# Altium PCB SprinklerBoard.PcbDoc
Units mil, origin at the board's own origin, x right, y up, seen from the top; angles counter-clockwise.
Board outline 6000 x 6000 mil, 2 copper layers (Top Layer, Bottom Layer); 42 components, 48 nets, 148 pads, 12 vias.
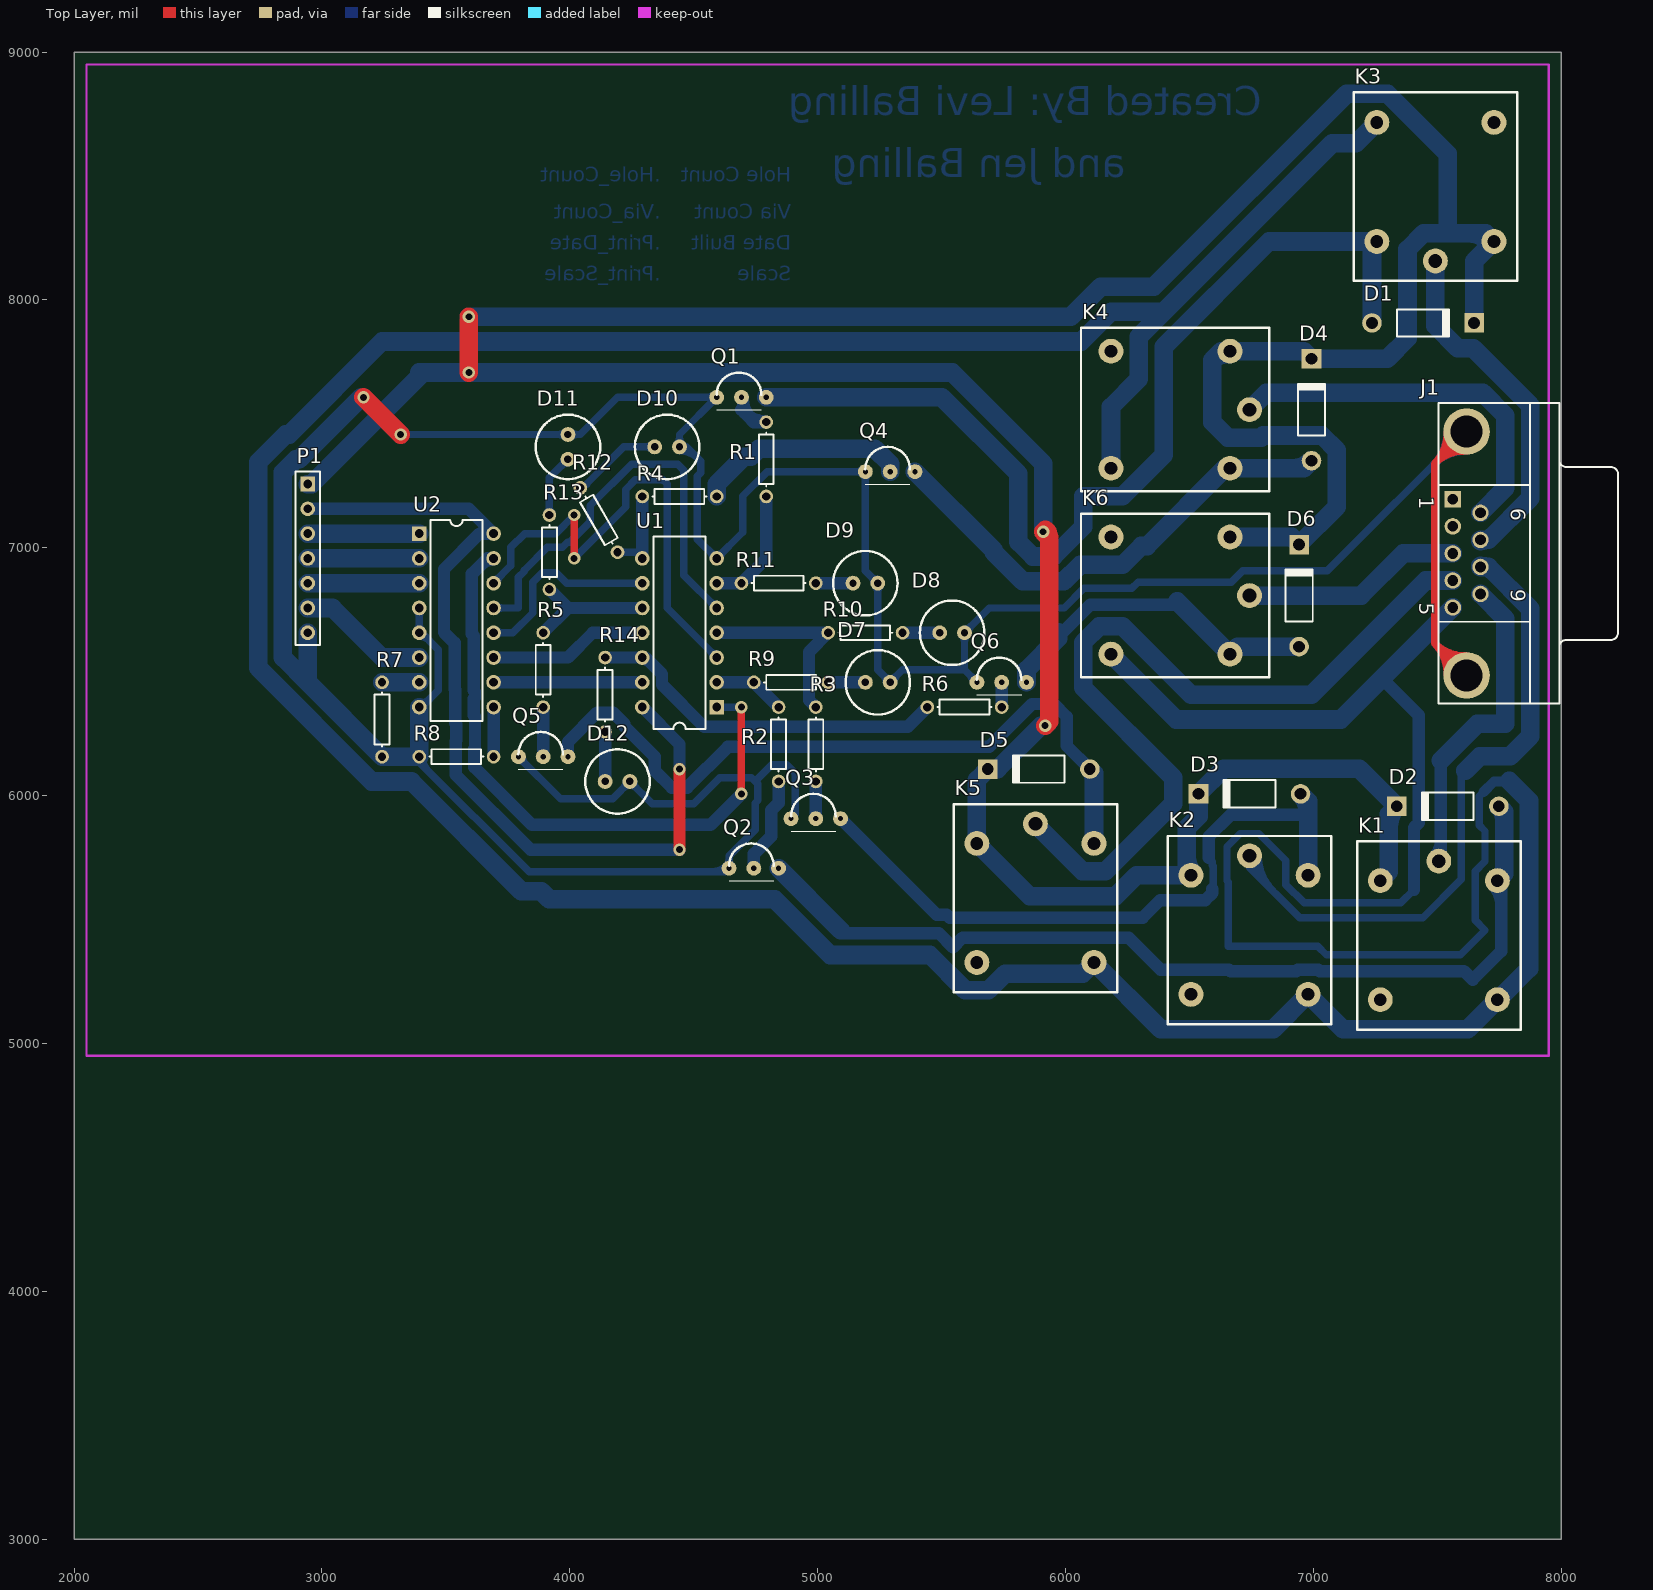
[diagram p0: Top Layer view]
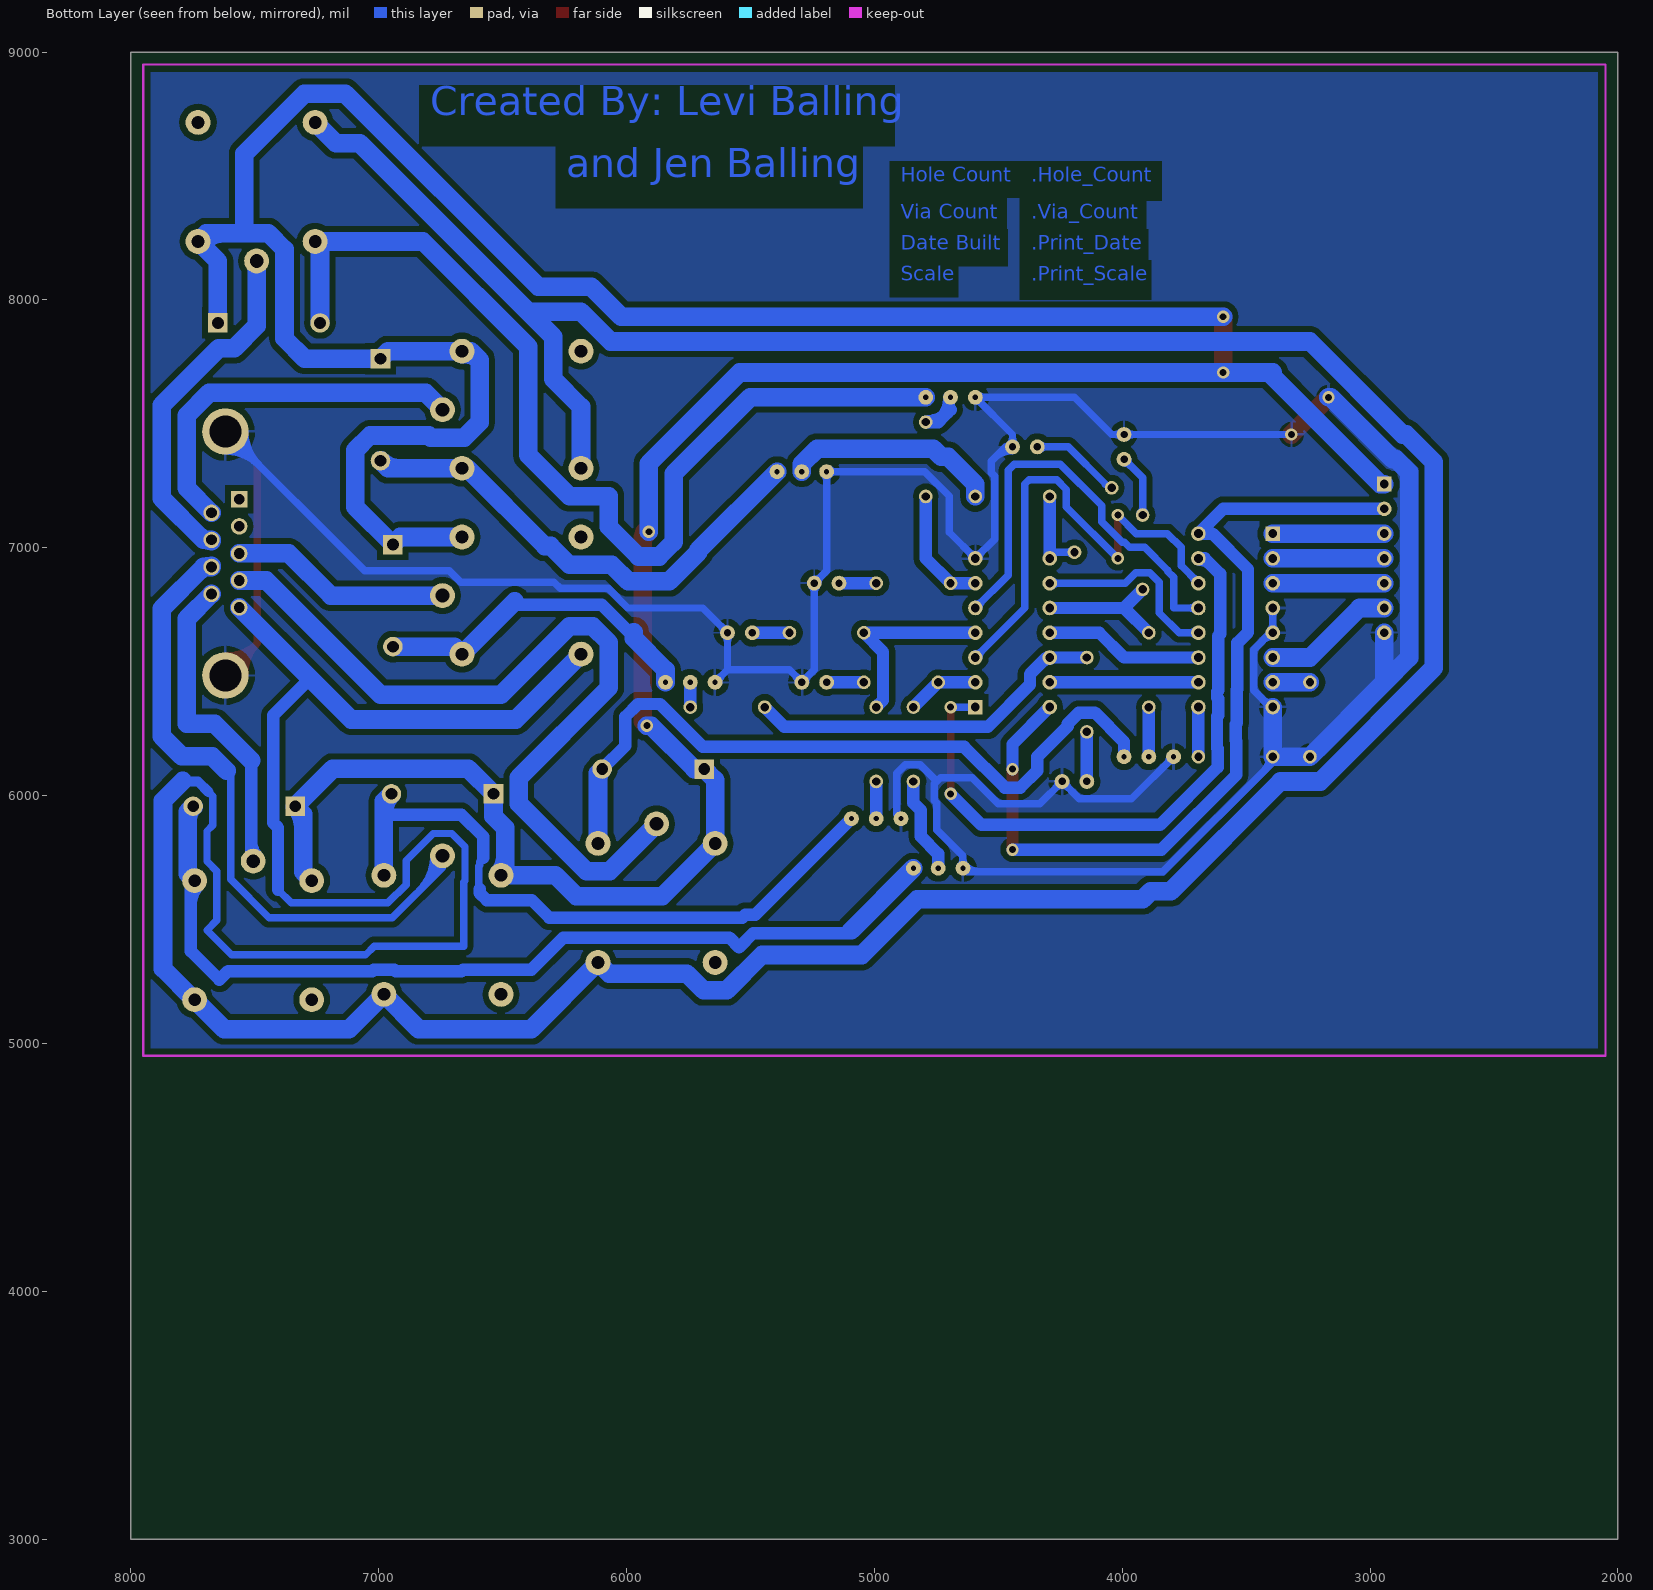
[diagram p1: Bottom Layer view, seen from below]

## Layer stack, top to bottom
Top Layer: signal copper 1.4
Dielectric: dielectric 12.6, FR-4, Dk 4.8
Bottom Layer: signal copper 1.4

## Board outline
2000,3000 8000,3000 8000,9000 2000,9000

## Design rules (kind name [scope] priority, off if disabled: settings)
Clearance [All] p1: gap=25
PolygonConnect [All] p1: connectstyle=Relief reliefconductorwidth=10 reliefentries=4 polygonreliefangle="90 Angle"
RoomDefinition SprinklerBoard [InComponentClass('SprinklerBoard')] p1: confinementstyle=ConfineIn formatcopy=TRUE lockcomponents=FALSE outline 7950,8950 2050,8950 2050,4950 7950,4950
RoutingVias [All] p1: holewidth=32 width=75 viastyle="Through Hole" minholewidth=28 minwidth=50 maxholewidth=28 maxwidth=50
SilkscreenOverComponentPads [All] p1: minsilkscreentomaskgap=10
SolderMaskExpansion [All] p1: expansion=4
Width [All] p1: maxlimit=100 minlimit=25 preferedwidth=50 minimp=50.000000 maximp=50.000000 favimp=50.000000
27 further rules are at their usual default settings.

## Components (designator, comment, footprint, x,y, rotation, side; value= is the part's Value field where it differs from the comment)
D1 "1N4001" DO-41 7442.5,7907.26 r0 top
D2 "1N4001" DO-41 7542.5,5957.26 r180 top
D3 "1N4001" DO-41 6742.5,6007.26 r180 top
D4 "1N4001" DO-41 6992.5,7557.26 r90 top
D5 "1N4001" DO-41 5892.5,6107.26 r180 top
D6 "1N4001" DO-41 6942.5,6807.26 r90 top
D7 "LED_White" LED 5192.5,6457.26 r0 top
D8 "LED_White" LED 5492.5,6657.26 r0 top
D9 "LED_White" LED 5142.5,6857.26 r0 top
D10 "LED_White" LED 4342.5,7407.26 r0 top
D11 "LED_White" LED 3992.5,7357.26 r90 top
D12 "LED_White" LED 4142.5,6057.26 r0 top
J1 "D Connector 9" DSUB1.385-2H9 7992.5,6977.26 r270 top
K1 "SPDT" "Relay  SPDT Tayda" 7506.28,5736 r0 top
K2 "SPDT" "Relay  SPDT Tayda" 6742.5,5757.26 r0 top
K3 "SPDT" "Relay  SPDT Tayda" 7492.5,8157.26 r180 top
K4 "SPDT" "Relay  SPDT Tayda" 6742.5,7557.26 r270 top
K5 "SPDT" "Relay  SPDT Tayda" 5878.72,5886 r0 top
K6 "SPDT" "Relay  SPDT Tayda" 6742.5,6807.26 r270 top
P1 "Header 7" HDR1X7 2942.5,7257.26 r270 top
Q1 "2N3904" 2N3904 4592.5,7607.26 r0 top
Q2 "2N3904" 2N3904 4642.5,5707.26 r0 top
Q3 "2N3904" 2N3904 4892.5,5907.26 r0 top
Q4 "2N3904" 2N3904 5192.5,7307.26 r0 top
Q5 "2N3904" 2N3904 3792.5,6157.26 r0 top
Q6 "2N3904" 2N3904 5642.5,6457.26 r0 top
R1 "Res1" AXIAL-0.3 4792.5,7357.26 r270 top
R2 "Res1" AXIAL-0.3 4842.5,6207.26 r90 top
R3 "Res1" AXIAL-0.3 4992.5,6207.26 r90 top
R4 "Res1" AXIAL-0.3 4442.5,7207.26 r180 top
R5 "Res1" AXIAL-0.3 3892.5,6507.26 r90 top
R6 "Res1" AXIAL-0.3 5592.5,6357.26 r180 top
R7 "Res1" AXIAL-0.3 3242.5,6307.26 r90 top
R8 "Res1" AXIAL-0.3 3542.5,6157.26 r0 top
R9 "Res1" AXIAL-0.3 4892.5,6457.26 r0 top
R10 "Res1" AXIAL-0.3 5192.5,6657.26 r0 top
R11 "Res1" AXIAL-0.3 4842.5,6857.26 r0 top
R12 "Res1" AXIAL-0.3 4117.5,7112.17 r120 top
R13 "Res1" AXIAL-0.3 3917.5,6982.26 r90 top
R14 "Res1" AXIAL-0.3 4142.5,6407.26 r270 top
U1 "SN7416N" N014 4442.5,6657.26 r90 top
U2 "74AC138B" DIP16 3542.5,6707.26 r270 top

## Footprints (in the part's own frame and the unit in brackets; to place one, negate y for a bottom-side part, rotate by r counter-clockwise, add the part's x,y. Pads: shape width x height; smd on the part's side, far side on the other; paste and mask are expansions set on the pad)
2N3904 [mil] "simple transistor, but bigger holes and pads"
  round 60 hole 21: 1(0,0) 2(100,0) 3(200,0)
  silkscreen extent 0,-50 180,100
AXIAL-0.3 [mm] "Axial Device, Thru-Hole; 2 Leads; 0.3 in Pin Spacing"
  round 1.4 hole 0.85: 1(-3.81,0) 2(3.81,0)
  silkscreen extent -2.77,-0.76 2.77,0.76
DIP16 [mm] "DIP; 16 Leads; Row Spacing 7.62 mm; Pitch 2.54 mm"
  rect 1.5x1.5 hole 0.9: 1(-8.89,-3.81)
  round 1.5 hole 0.9: 2(-6.35,-3.81) 3(-3.81,-3.81) 4(-1.27,-3.81) 5(1.27,-3.81) 6(3.81,-3.81) 7(6.35,-3.81) 8(8.89,-3.81) 9(8.89,3.81) 10(6.35,3.81) 11(3.81,3.81) 12(1.27,3.81) 13(-1.27,3.81) 14(-3.81,3.81) 15(-6.35,3.81) 16(-8.89,3.81)
  silkscreen extent -10.3,-2.65 10.3,2.65
DO-41 [mm] "Diode, Axial; Body 5.2 x 2.7 mm (LxDia. max), Lead Dia. 0.86 mm (max)"
  round 2 hole 1.2: 1(-5.23,0)
  rect 2x2 hole 1.2: 2(5.23,0)
  silkscreen extent -2.65,-1.4 2.75,1.4
DSUB1.385-2H9 [mm] "Connector; D Subminiature; 9 Position; Right Angle; Pitch 1.385 mm"
  rect 1.69x1.69 hole 1.09: 1(-5.54,-10.92)
  round 1.69 hole 1.09: 2(-2.77,-10.92) 3(0,-10.92) 4(2.77,-10.92) 5(5.54,-10.92) 6(-4.155,-8.08) 7(-1.385,-8.08) 8(1.385,-8.08) 9(4.155,-8.08)
  round 4.76 hole 3.26: 10(-12.495,-9.5) 11(12.495,-9.5)
  silkscreen extent -15.4,-12.4 15.4,6
HDR1X7 [mm] "Connector; Header; 7 Position"
  rect 1.5x1.5 hole 0.9: 1(0,0)
  round 1.5 hole 0.9: 2(2.54,0) 3(5.08,0) 4(7.62,0) 5(10.16,0) 6(12.7,0) 7(15.24,0)
  silkscreen extent -1.27,-1.27 16.51,1.27
LED [mil] "standard 5mm LED"
  round 60 hole 30: 1(0,0) 2(100,0)
  silkscreen extent -80,-130 180,130
N014 [mm] "DIP; 14 Leads; Row Spacing 7.62 mm; Pitch 2.54 mm"
  rect 1.5x1.5 hole 0.9: 1(-7.62,-3.81)
  round 1.5 hole 0.9: 2(-5.08,-3.81) 3(-2.54,-3.81) 4(0,-3.81) 5(2.54,-3.81) 6(5.08,-3.81) 7(7.62,-3.81) 8(7.62,3.81) 9(5.08,3.81) 10(2.54,3.81) 11(0,3.81) 12(-2.54,3.81) 13(-5.08,3.81) 14(-7.62,3.81)
  silkscreen extent -9.85,-2.65 9.85,2.65
"Relay  SPDT Tayda" [mm] "this is the ATTC-3372"
  round 2.54 hole 1.4: 0(0,0)
  round 2.54 hole 1.3: 1(6,-2) 2(-6,-2) 3(6,-14.2) 4(-6,-14.2)
  silkscreen extent -8.38,-17.27 8.38,2.03

## Part data
D1 D2 D3 D4 D5 D6: "1.0 Ampere General Purpose Rectifier"
D7 D8 D9 D10 D11 D12: library part LED0, "Typical INFRARED GaAs LED"
J1: "Receptacle Assembly, 9 Position, Right Angle"
P1: "Header, 7-Pin"
Q1 Q2 Q3 Q4 Q5 Q6: "NPN General Purpose Amplifier"
R1 R2 R3 R4 R5 R6 R7 R8 R9 R10 R11 R12 R13 R14: "Resistor"
U1: "Hex Inverter Buffer / Driver with High-Voltage Outputs"
U2: "3-to-8 Line Decoder Inverting"

## Via types
v1: diameter 50, hole 28, Top Layer to Bottom Layer, 12 vias

## Nets (pads, with @x,y where several pads share a name; then routed paths per layer and width w, separated by ;. In a path a pad name is that pad's centre, name@x,y a point inside that pad or via, vN(x,y) a via of type N, cw(c..) or ccw(c..) an arc to the next point about the centre after c; other vN are vias at no path point)
DEMUX_A: P1.3 U2.1 | length 450
  Bottom Layer w75: P1.3 U2.1
DEMUX_B: P1.4 U2.2 | length 450
  Bottom Layer w75: P1.4 U2.2
DEMUX_C: P1.5 U2.3 | length 450
  Bottom Layer w75: P1.5 U2.3
GND: D7.2 D8.2 D9.2 D10.2 D11.2 D12.2 J1.10 J1.11 P1.7 Q1.1 Q2.1 Q3.1 Q4.1 Q5.1 Q6.1 R7.1 R8.1 U1.7 U2.4 U2.5 U2.8 | length 17199.3
  Top Layer w30: J1.11@7539.81,6487.55 ccw(c7367.24,6492.42) 7489.32,6614.5 ; J1.10@7539.81,7466.97 cw(c7367.24,7462.1) 7489.32,7340.03 cw(c7611.4,7217.95) J1.10@7616.26,7390.52 ; J1.11@7569.8,6486.71 ccw(c7463.01,6489.72) 7538.55,6565.27 ccw(c7614.1,6640.81) J1.11@7617.11,6534.02 ; J1.10@7569.8,7467.82 cw(c7463.01,7464.81) 7538.55,7389.26 cw(c7614.1,7313.72) J1.10@7617.11,7420.51 ; J1.11@7616.26,6564 cw(c7611.4,6736.58) 7489.32,6614.5 ; J1.11 7489.31,6614.51 ; J1.10 7489.31,7340.02 7489.31,6614.51
  Top Layer w75: v1(3167.5,7607.26) v1(3317.5,7457.26)
  Bottom Layer w30: v1(3317.5,7457.26) D11.2 4042.5,7457.26 4192.5,7607.26 Q1.1 4442.5,7457.26 D10.2 4470.28,7407.26 4528.81,7348.74 4528.81,7303.17 4515,7289.37 4515,7034.76 U1.7 4696.96,7061.72 4696.96,7207.26 4796.96,7307.26 Q4.1 5192.5,6907.26 D9.2 5242.5,6507.26 D7.2 5342.5,6507.26 5592.5,6507.26 ; U2.5@3382.23,6667.54 ccw(c3357.43,6692.34) 3392.5,6692.34 ccw(c3427.57,6692.34) U2.5@3402.77,6667.54 ; U2.4@3382.23,6746.99 cw(c3357.43,6722.19) 3392.5,6722.19 cw(c3427.57,6722.19) U2.4@3402.77,6746.99 ; R8.1 3392.5,6135.53 3835.77,5692.26 4627.5,5692.26 Q2.1 4642.5,5757.26 4747.5,5862.26 4747.5,5970.34 4757.5,5980.34 4757.5,6047.81 4747.5,6057.81 ; U2.8 3402.1,6357.26 3470,6425.16 3470,6589.37 3402.1,6657.26 U2.5 U2.4 ; U2.8@3392.5,6371.79 ccw(c3392.5,6430.04) 3433.69,6388.85 ; U2.5@3392.5,6642.74 cw(c3392.5,6584.48) 3433.69,6625.67 ; R8.1@3405.06,6157.26 ccw(c3487.85,6157.26) 3429.31,6098.72 ; Q5.1@3792.5,6142.26 cw(c3792.5,6106.05) 3818.11,6131.66 cw(c3843.71,6157.26) Q5.1@3807.5,6157.26 ; Q5.1 3962.5,5987.26 4172.5,5987.26 D12.2 4332.5,5967.26 4500.49,5967.26 4605.49,6072.26 4733.04,6072.26 4747.5,6057.81 ; D11.2@3981.89,7446.66 ccw(c3956.29,7421.05) 3956.29,7457.26 ccw(c3956.29,7493.48) D11.2@3981.89,7467.87 ; D11.2@4003.11,7446.66 cw(c4028.71,7421.05) 4028.71,7457.26 cw(c4028.71,7493.48) D11.2@4003.11,7467.87 ; D12.2@4227.5,6057.26 cw(c4191.29,6057.26) 4216.89,6031.66 cw(c4242.5,6006.05) 4242.5,6042.26 cw(c4242.5,6006.05) 4268.11,6031.66 cw(c4293.71,6057.26) D12.2@4257.5,6057.26 ; D10.2@4431.89,7417.87 ccw(c4406.29,7443.48) 4442.5,7443.48 ccw(c4478.71,7443.48) D10.2@4453.11,7417.87 ; D10.2@4442.5,7392.26 cw(c4442.5,7288.98) 4515.53,7362.01 ; 4570.07,5692.26 ccw(c4570.07,5779.69) 4631.89,5717.87 ccw(c4606.29,5743.48) 4642.5,5743.48 ccw(c4678.71,5743.48) Q2.1@4653.11,5717.87 ; Q1.1@4577.5,7607.26 cw(c4541.29,7607.26) 4566.89,7581.66 cw(c4592.5,7556.05) Q1.1@4592.5,7592.26 ; U1.7@4577.97,6957.26 ccw(c4542.9,6957.26) 4567.7,6982.06 ccw(c4592.5,7006.86) 4592.5,6971.79 ccw(c4592.5,7006.86) 4617.3,6982.06 ccw(c4642.1,6957.26) U1.7@4607.03,6957.26 ; Q1.1@4581.89,7596.66 ccw(c4556.29,7571.05) 4556.29,7607.26 ccw(c4556.29,7643.48) Q1.1@4581.89,7617.87 ; Q3.1 4910.06,5924.82 4910.06,6089.7 4874.94,6124.82 4814.52,6124.82 4747.5,6057.81 ; Q4.1@5181.89,7317.87 cw(c5156.29,7343.48) 5156.29,7307.26 cw(c5156.29,7271.05) 5181.89,7296.66 cw(c5156.29,7271.05) 5192.5,7271.05 cw(c5228.71,7271.05) Q4.1@5203.11,7296.66 ; D9.2@5227.5,6857.26 ccw(c5191.29,6857.26) 5216.89,6882.87 ccw(c5242.5,6908.48) D9.2@5242.5,6872.26 ; D9.2@5231.89,6846.66 cw(c5206.29,6821.05) 5242.5,6821.05 cw(c5278.71,6821.05) D9.2@5253.11,6846.66 ; D7.2@5277.5,6457.26 ccw(c5241.29,6457.26) 5266.89,6482.87 ccw(c5292.5,6508.48) 5292.5,6472.26 ccw(c5292.5,6508.48) 5318.11,6482.87 ccw(c5343.71,6457.26) D7.2@5307.5,6457.26 ; D8.2@5581.89,6646.66 cw(c5556.29,6621.05) 5592.5,6621.05 cw(c5628.71,6621.05) D8.2@5603.11,6646.66 ; D8.2@5592.5,6672.26 ccw(c5592.5,6708.48) 5618.11,6682.87 ccw(c5643.71,6657.26) D8.2@5607.5,6657.26 ; Q6.1@5627.5,6457.26 ccw(c5591.29,6457.26) 5616.89,6482.87 ccw(c5642.5,6508.48) Q6.1@5642.5,6472.26 ; Q6.1 5592.5,6507.26 ; J1.10@7539.78,7469.19 cw(c7349.78,7469.19) 7484.13,7334.84 cw(c7618.48,7200.49) J1.10@7618.48,7390.49 ; J1.10@7569.78,7469.19 cw(c7452.21,7469.19) 7535.35,7386.06 cw(c7618.48,7302.92) J1.10@7618.48,7420.49 ; J1.10 7056.56,6907.26 6715.22,6907.26 6669,6861.04 6292.5,6861.04 6267.5,6836.04 6073.68,6836.04 5994.9,6757.26 5692.5,6757.26 D8.2 5592.5,6507.26
  Bottom Layer w75: P1.7 2942.5,6457.26 ; v1(3167.5,7607.26) 3158.92,7607.26 2908.92,7357.26 2895.06,7357.26 2842.5,7304.71 2842.5,6557.26 2942.5,6457.26 ; U2.8 R8.1 R7.1 2942.5,6457.26
NetD1_1: D1.1 K3.1 Q1.3 | length 4082.8
  Bottom Layer w75: Q1.3 5501.08,7607.26 5809.98,7298.37 5809.98,7023.37 5868.56,6964.79 5951.4,6964.79 6070.94,7084.33 6070.94,7208.54 6230.04,7208.54 6395.94,7374.44 6395.94,7810.71 6821.24,8236 K3.1 7236.59,8216.32 D1.1
NetD2_1: D2.1 K1.1 Q2.3 | length 3946.8
  Bottom Layer w50: 5092.5,5457.26 5105,5444.76 5489.33,5444.76 5546,5388.09 5584.85,5426.95 6254.7,5426.95 6383.44,5298.21 6659.63,5298.21 6665.58,5292.26 6931.35,5292.26 6937.3,5298.21 7020.14,5298.21 7026.09,5292.26 7607.5,5292.26 7642.5,5257.26 7757.5,5372.26 7757.5,5642.26 K1.1 ; K1.1@7724.82,5639.59 cw(c7645.93,5560.7) 7757.5,5560.7
  Bottom Layer w75: Q2.3 5092.5,5457.26 ; K1.1 7770,5684.76 7770,5935.67 D2.1 ; D2.1@7747.08,5955.94 cw(c7691.76,5900.62) 7770,5900.62
NetD3_1: D3.1 K2.1 Q3.3 | length 2813.4
  Bottom Layer w30: 6577.5,5748.72 6592.5,5733.72 6592.5,5719.58 6596.28,5715.8 6596.28,5641.24 6592.5,5637.47 6592.5,5623.32
  Bottom Layer w50: Q3.3 5480,5519.76 5520.4,5519.76 5532.9,5507.26 6311.12,5507.26 6382.38,5578.52 6563.76,5578.52 6592.5,5607.26 6592.5,5623.32 ; 6577.5,5748.72 6577.5,5834.19 6665.58,5922.26 6963.72,5922.26 6978.72,5907.26
  Bottom Layer w75: D3.1@6947.08,6005.94 cw(c6870.7,5929.56) 6978.72,5929.56 ; D3.1 6978.72,5976.95 6978.72,5907.26 K2.1
NetD4_1: D4.1 K4.1 Q4.3 | length 2074.3
  Bottom Layer w75: Q4.3 5709.98,6989.79 5709.98,6981.94 5827.13,6864.79 5992.82,6864.79 6059.02,6930.98 6230.04,6930.98 6306.32,7007.26 6329.12,7007.26 6642.9,7321.04 K4.1 6962.19,7321.04 D4.1 ; 6914.8,7321.04 ccw(c6914.8,7429.06) D4.1@6991.18,7352.68
NetD5_1: D5.1 K5.1 Q5.3 | length 3050.5
  Bottom Layer w50: Q5.3 3992.5,6216.95 4110.37,6334.82 4174.63,6334.82 4220.06,6289.39 4220.06,6279.7 4342.5,6157.26 4342.5,6101.2 4411.43,6032.26 4473.57,6032.26 4637.94,6196.63 5691.56,6196.63 5864.69,6369.76 5953.74,6369.76 6005,6318.51 6005,6200.67 D5.1
  Bottom Layer w75: D5.1@6097.08,6105.94 cw(c6053.97,6062.83) 6114.94,6062.83 ; D5.1 6114.94,6090.73 K5.1
NetD6_1: D6.1 K6.1 Q6.3 | length 1378.7
  Bottom Layer w50: 5970.94,6659.06 5988.62,6659.06 6100.6,6771.04 6438.76,6771.04 6451.26,6783.54
  Bottom Layer w75: Q6.3 5842.5,6507.26 5970.94,6635.71 5970.94,6659.06 ; 6451.26,6783.54 K6.1 6694.07,6601.36 D6.1
NetD7_1: D7.1 R9.2 | length 150
  Bottom Layer w50: R9.2 D7.1
NetD8_1: D8.1 R10.2 | length 150
  Bottom Layer w50: R10.2 D8.1
NetD9_1: D9.1 R11.2 | length 150
  Bottom Layer w50: R11.2 D9.1
NetD10_1: D10.1 R12.2 | length 394
  Bottom Layer w30: 4067.5,7257.26 4217.5,7407.26 D10.1 ; D10.1@4331.89,7396.66 ccw(c4306.29,7371.05) 4306.29,7407.26 ccw(c4306.29,7443.48) D10.1@4331.89,7417.87
NetD11_1: D11.1 R13.2 | length 360.6
  Bottom Layer w30: R13.2@3908.62,7141.14 ccw(c3887.18,7162.58) 3917.5,7162.58 ccw(c3947.82,7162.58) R13.2@3926.38,7141.14 ; R13.2 3917.5,7282.26 D11.1 ; D11.1@3977.5,7357.26 cw(c3941.29,7357.26) 3966.89,7331.66 cw(c3992.5,7306.05) D11.1@3992.5,7342.26
NetD12_1: D12.1 R14.2 | length 200
  Bottom Layer w50: D12.1 R14.2
NetQ1_2: Q1.2 R1.1 | length 324.7
  Bottom Layer w50: 4692.5,7557.26 4742.5,7507.26 R1.1 ; Q1.2@4697.5,7607.26 ccw(c4830.28,7607.26) 4736.39,7513.37 ; 4702.78,7546.99 ccw(c4792.5,7636.71) R1.1@4792.5,7509.82
NetQ2_2: Q2.2 R2.1 | length 391.4
  Bottom Layer w50: Q2.2 4742.5,5765.34 4812.5,5835.34 4812.5,5940.4 4842.5,5970.4 R2.1
NetQ3_2: Q3.2 R3.1 | length 150
  Bottom Layer w50: Q3.2 R3.1
NetQ4_2: Q4.2 R4.1 | length 865.4
  Bottom Layer w75: R4.1 4592.5,7257.26 4702.44,7367.2 4729.8,7367.2 4762.36,7399.76 5230.81,7399.76 5292.5,7338.08 Q4.2
NetQ5_2: Q5.2 R5.1 | length 200
  Bottom Layer w50: Q5.2 R5.1
NetQ6_2: Q6.2 R6.1 | length 100
  Bottom Layer w50: R6.1 Q6.2
NetR7_2: R7.2 U2.7 | length 150
  Bottom Layer w75: R7.2 U2.7
NetR8_2: R8.2 U2.9 | length 200
  Bottom Layer w50: R8.2 U2.9
NetU1_1: U1.1 U2.15 | length 2690.2
  Top Layer w30: v1(4692.5,6007.26) v1(4692.5,6357.26)
  Bottom Layer w30: U1.1 v1(4692.5,6357.26) ; U1.1@4602.77,6346.99 cw(c4627.57,6322.19) 4627.57,6357.26 cw(c4627.57,6392.34) U1.1@4602.77,6367.54
  Bottom Layer w50: 3642.09,6931.86 cw(c3692.5,6881.45) U2.15@3692.5,6952.74 ; U2.15 3667.5,6957.26 3605,6894.76 3605,6652.36 3612.97,6644.38 3612.97,6424.32 3617.5,6419.8 3617.5,6394.73 3612.97,6390.21 3612.97,6324.32 3617.5,6319.8 3617.5,6191.95 3614.94,6189.39 3614.94,6114.63 3847.31,5882.26 4567.5,5882.26 v1(4692.5,6007.26)
NetU1_3: U1.3 U2.14 | length 2106
  Top Layer w30: v1(4017.5,6957.26) v1(4017.5,7132.26)
  Bottom Layer w30: U2.14 3692.5,6858.94 3762.03,6928.46 3762.03,7001.79 3817.5,7057.26 3942.5,7057.26 v1(4017.5,7132.26) ; U2.14@3692.5,6871.79 ccw(c3692.5,6902.82) 3714.44,6880.88 ; U2.14@3707.03,6857.26 cw(c3746.14,6857.26) 3718.48,6884.92 ; v1(4017.5,6957.26) 4224.94,7164.7 4224.94,7235.25 4264.52,7274.82 4374.94,7274.82 4392.5,7257.26 4392.5,6757.26 U1.3 ; U1.3@4577.97,6557.26 ccw(c4542.9,6557.26) 4567.7,6582.06 ccw(c4592.5,6606.86) U1.3@4592.5,6571.79
NetU1_5: U1.5 U2.13 | length 1851.2
  Bottom Layer w30: U2.13 3792.5,6757.26 3792.5,6881.16 3817.03,6905.68 3817.03,6909.57 3909.72,7002.26 3970.58,7002.26 3990.58,7022.26 3999.42,7022.26 4082.5,7105.34 4082.5,7170.59 4249.18,7337.26 4434.88,7337.26 4460,7312.15 4460,6889.76 U1.5 ; U2.13@3702.77,6746.99 cw(c3727.57,6722.19) 3727.57,6757.26 cw(c3727.57,6792.34) U2.13@3702.77,6767.54 ; U1.5@4577.97,6757.26 ccw(c4542.9,6757.26) 4567.7,6782.06 ccw(c4592.5,6806.86) U1.5@4592.5,6771.79
NetU1_9: U1.9 U2.12 | length 900.5
  Bottom Layer w30: U2.12 3770.28,6657.26 3849.94,6736.92 3849.94,6860.25 3889.52,6899.82 3945.48,6899.82 3988.04,6857.26 U1.9 ; U2.12@3702.77,6646.99 cw(c3727.57,6622.19) 3727.57,6657.26 cw(c3727.57,6692.34) U2.12@3702.77,6667.54 ; U1.9@4282.23,6846.99 ccw(c4257.43,6822.19) 4257.43,6857.26 ccw(c4257.43,6892.34) U1.9@4282.23,6867.54
NetU1_11: U1.11 U2.11 | length 641.4
  Bottom Layer w50: U2.11 3992.5,6557.26 4092.5,6657.26 U1.11
NetU1_13: U1.13 U2.10 | length 600
  Bottom Layer w50: U2.10 U1.13
SPRINKLER_24_AC_VCC: J1.5 K1.3 K2.3 K3.3 K4.3 K5.3 K6.3 | length 19259.2
  Bottom Layer w30: 7406.28,5621.04 7352.5,5567.26 6962.7,5567.26 6888.72,5641.24 6888.72,5738.32 6779.78,5847.26 6705.22,5847.26 6651.69,5793.74 6651.69,5656.05 6657.5,5650.25 6657.5,5392.26 7018.01,5392.26 7053.01,5357.26 7592.5,5357.26 7692.5,5457.26 7652.5,5497.26 7652.5,5694.54 7692.5,5734.54 7692.5,5857.26 7669.04,5880.73 7669.04,5997.21 7685.79,6013.97 ; 7788.76,6057.26 7790.63,6059.13
  Bottom Layer w40: 7685.79,6013.97 7729.09,6057.26 7788.76,6057.26
  Bottom Layer w50: 7276.59,6473.17 7425.96,6323.8 7425.96,5890.73 7406.28,5871.04 7406.28,5621.04
  Bottom Layer w75: K6.3 6447.22,6307.26 7110.69,6307.26 7276.59,6473.17 J1.5 ; K4.3 6183.44,7568.48 6295.94,7680.98 6295.94,7852.13 6396.79,7952.97 ; K3.3 7172.22,8632.26 7076.08,8632.26 6396.79,7952.97 ; 7790.63,6059.13 7870,5979.76 7870,5302.26 7744.69,5176.95 K1.3 7622.81,5057.26 7119.67,5057.26 K2.3 6837.78,5057.26 6384.63,5057.26 K5.3 6070.26,5282.26 5756.91,5282.26 5689.1,5214.45 5595.9,5214.45 5453.09,5357.26 5051.08,5357.26 4826.08,5582.26 3917.5,5582.26 3885,5614.76 3803.67,5614.76 3361.17,6057.26 3201.08,6057.26 2742.5,6515.84 2742.5,7346.13 2853.64,7457.26 2867.5,7457.26 3242.5,7832.26 6063.13,7832.26 6183.84,7952.97 6396.79,7952.97
SPRINKLER_DEMUX_ENABLED: P1.6 U2.6 | length 532.8
  Bottom Layer w75: P1.6 3042.5,6757.26 3242.5,6557.26 U2.6
SPRINKLERGND: J1.1
SPRINKLERSTATION1: J1.9 K1.0 | length 1363.7
  Bottom Layer w50: K1.0@7488.6,5753.68 ccw(c7428.58,5813.71) 7513.46,5813.71 ; K1.0@7513.46,5743.19 7513.46,6141.98
  Bottom Layer w75: K1.0 K1.0@7513.46,5743.19 ; 7513.46,6141.98 7660.94,6289.45 7774.69,6289.45 7774.69,6713.39 J1.9
SPRINKLERSTATION2: J1.8 K2.0 | length 2909.4
  Bottom Layer w30: K2.0 6742.5,5709.68 6944.92,5507.26 7442.5,5507.26 7597.5,5662.26 7597.5,6084.59 7613.46,6100.56 ; K2.0@6747.5,5757.26 ccw(c6874.44,5757.26) 6784.68,5667.5 ; K2.0@6777.5,5757.26 ccw(c6976.87,5757.26) 6835.89,5616.29
  Bottom Layer w75: 7613.46,6100.56 7672.04,6159.13 7794.37,6159.13 7875,6239.76 7875,6754.49 7706.76,6922.74 J1.8 ; J1.8@7674.39,6926.97 cw(c7674.39,6859.05) 7722.42,6907.08
SPRINKLERSTATION3: J1.7 K3.0 | length 1475.3
  Bottom Layer w75: K3.0 7492.5,7896.04 7583.15,7805.39 7644.61,7805.39 7875,7575 7875,7200.04 7706.76,7031.79 J1.7 ; J1.7@7674.39,7027.56 ccw(c7674.39,7095.48) 7722.42,7047.45
SPRINKLERSTATION4: J1.6 K4.0 | length 1532.9
  Bottom Layer w75: K4.0 6810.63,7625.39 7683.18,7625.39 7774.69,7533.89 7774.69,7241.14 J1.6
SPRINKLERSTATION5: J1.4 K5.0 | length 3374
  Bottom Layer w75: K5.0 5878.72,5884.39 6068.34,5694.76 6161.54,5694.76 6434.72,5967.95 6434.72,6072.52 6070.94,6436.3 6070.94,6617.64 6136.85,6683.54 6230.04,6683.54 6506.32,6407.26 6992.5,6407.26 7453.44,6868.21 J1.4
SPRINKLERSTATION6: J1.3 K6.0 | length 890.5
  Bottom Layer w75: K6.0 7192.5,6807.26 7362.5,6977.26 J1.3
STATION1TRIGGER: R2.2 R9.1 U1.2 | length 291.4
  Bottom Layer w50: U1.2 R9.1 R2.2
STATION2TRIGGER: R3.2 R10.1 U1.4 | length 793.5
  Bottom Layer w50: U1.4 R10.1 4964.94,6579.7 4964.94,6384.82 R3.2
STATION3TRIGGER: R1.2 R11.1 U1.6 | length 491.4
  Bottom Layer w50: U1.6 R11.1 4792.5,6957.26 R1.2
STATION4TRIGGER: R4.2 R12.1 U1.8 | length 408
  Bottom Layer w30: R12.1 4267.5,6982.26 U1.8 ; R12.1@4201.38,6973.38 cw(c4222.82,6951.94) 4222.82,6982.26 cw(c4222.82,7012.58) R12.1@4201.38,6991.14
  Bottom Layer w50: U1.8 R4.2
STATION5TRIGGER: R5.2 R13.1 U1.10 | length 547.5
  Bottom Layer w50: R5.2 3992.5,6757.26 ; R13.1 3992.5,6757.26 ; U1.10 3992.5,6757.26
STATION6TRIGGER: R6.2 R14.1 U1.12 | length 1505.7
  Bottom Layer w50: R14.1 U1.12 4304.97,6557.26 4372.03,6490.21 4372.03,6447.97 4542.26,6277.74 5362.97,6277.74 R6.2 ; U1.12@4292.5,6552.74 cw(c4292.5,6511.7) 4321.51,6540.72
VCC: 
VCC5: P1.2 U1.14 U2.16 | length 3567.1
  Top Layer w50: v1(4442.5,5782.26) v1(4442.5,6107.26)
  Bottom Layer w50: P1.2 3592.5,7157.26 U2.16 3636.43,7057.26 3492.5,6913.33 3492.5,6658.79 3535,6616.29 3535,6429.57 3537.97,6426.6 3537.97,6293.26 3542.5,6288.73 3542.5,6223.02 3539.94,6220.46 3539.94,6083.57 3841.24,5782.26 v1(4442.5,5782.26) ; U1.14 4442.5,6207.26 v1(4442.5,6107.26)
VCC12: D1.2 D2.2 D3.2 D4.2 D5.2 D6.2 K1.2 K2.2 K3.2 K4.2 K5.2 K6.2 P1.1 | length 16487.8
  Top Layer w75: v1(3592.5,7707.26) v1(3592.5,7932.26) ; v1(5909.98,7064.79) 5935,7039.76 5935,6299.76 v1(5917.5,6282.26) ; v1@5918.82,7073.63 cw(c5879.75,7034.55) 5935,7034.55 ccw(c5879.75,7034.55) v1@5918.82,7073.63
  Bottom Layer w75: P1.1 2958.92,7257.26 3392.5,7690.84 3392.5,7707.26 v1(3592.5,7707.26) 5542.5,7707.26 5909.98,7339.79 v1(5909.98,7064.79) ; v1(3592.5,7932.26) 6021.7,7932.26 6142.41,8052.97 6355.37,8052.97 7134.66,8832.26 7299.43,8832.26 7542.5,8589.2 7542.5,8269.76 ; v1(5917.5,6282.26) 5900.93,6282.26 5725.93,6107.26 D5.2 5642.5,6063.17 K5.2 5855,5594.76 6202.96,5594.76 6286.72,5678.52 K2.2 6490,5694.8 6490,5870.43 6536.59,5917.03 D3.2 6638.46,6109.13 7184.72,6109.13 D2.2 7305,5925.67 7305,5692.21 K1.2 ; 6490,5748 ccw(c6575.76,5748) K2.2@6515.12,5687.36 ; K4.2@6662.18,7781.08 ccw(c6651.62,7698.15) 6592.5,7757.27 ; K6.2 6912.19,7043.48 D6.2 7094.37,7165.04 7094.37,7393.55 7034.7,7453.23 6797.56,7453.23 6789.1,7444.76 6655,7444.76 6592.5,7507.26 6592.5,7757.26 ; 7305,5876.47 cw(c7417.39,5876.47) D2.2@7337.92,5955.94 ; 7617.04,8269.76 cw(c7617.04,8124.32) K3.2@7719.88,8227.17 ; D1.2 7648.41,8155.69 K3.2 7694.96,8269.76 7542.5,8269.76 ; 6592.5,7757.26 6628.72,7793.48 K4.2 6962.19,7793.48 D4.2 7298.41,7763.17 7380,7844.76 7380,8203.86 7445.9,8269.76 7542.5,8269.76
pads on no net: J1.2 K1.4 K2.4 K3.4 K4.4 K5.4 K6.4

## Polygon pours and split planes (outlines as drawn)
GND on Bottom Layer "GndPlane" (solid, pour order 2): 2050,4950 7950,4950 7950,8950 2050,8950

## Keep-outs
Keep-Out Layer:
  lines w10: 2050,4950 7950,4950 7950,8950 2050,8950 2050,4950

## Other copper
Bottom Layer:
  text "Created By: Levi Balling" at 6792.5,8707.26 h200
  text ".Hole_Count" at 4367.5,8457.26 h100
  text "Hole Count" at 4892.5,8457.26 h100
  text "and Jen Balling" at 6242.5,8457.26 h200
  text ".Via_Count" at 4367.5,8307.26 h100
  text "Via Count" at 4892.5,8307.26 h100
  text ".Print_Date" at 4367.5,8182.26 h100
  text "Date Built" at 4892.5,8182.26 h100
  text ".Print_Scale" at 4367.5,8057.26 h100
  text "Scale" at 4892.5,8057.26 h100

## Silkscreen, mask and mechanical layers (free items; w line width, h text height)
Drill Drawing:
  text ".LEGEND" at 8200,3200 h60
  text "Drill Drawing." at 8200,3100 h60

## Dimensions
2050,4950 to 7950,4950 on Mechanical 1
2050,4950 to 2050,8950 on Mechanical 1

## Text inside footprints (layer, text, board x,y; h text height)
J1: Top Overlay "6" at 7796.63,7160.53 h59.06 r270; Top Overlay "9" at 7796.63,6833.37 h59.06 r270; Top Overlay "5" at 7426.56,6778.84 h59.06 r270; Top Overlay "1" at 7426.56,7205.22 h59.06 r270